# EAGLE board Emergency Light with Battery Charger (EAGLE 6.5.0)
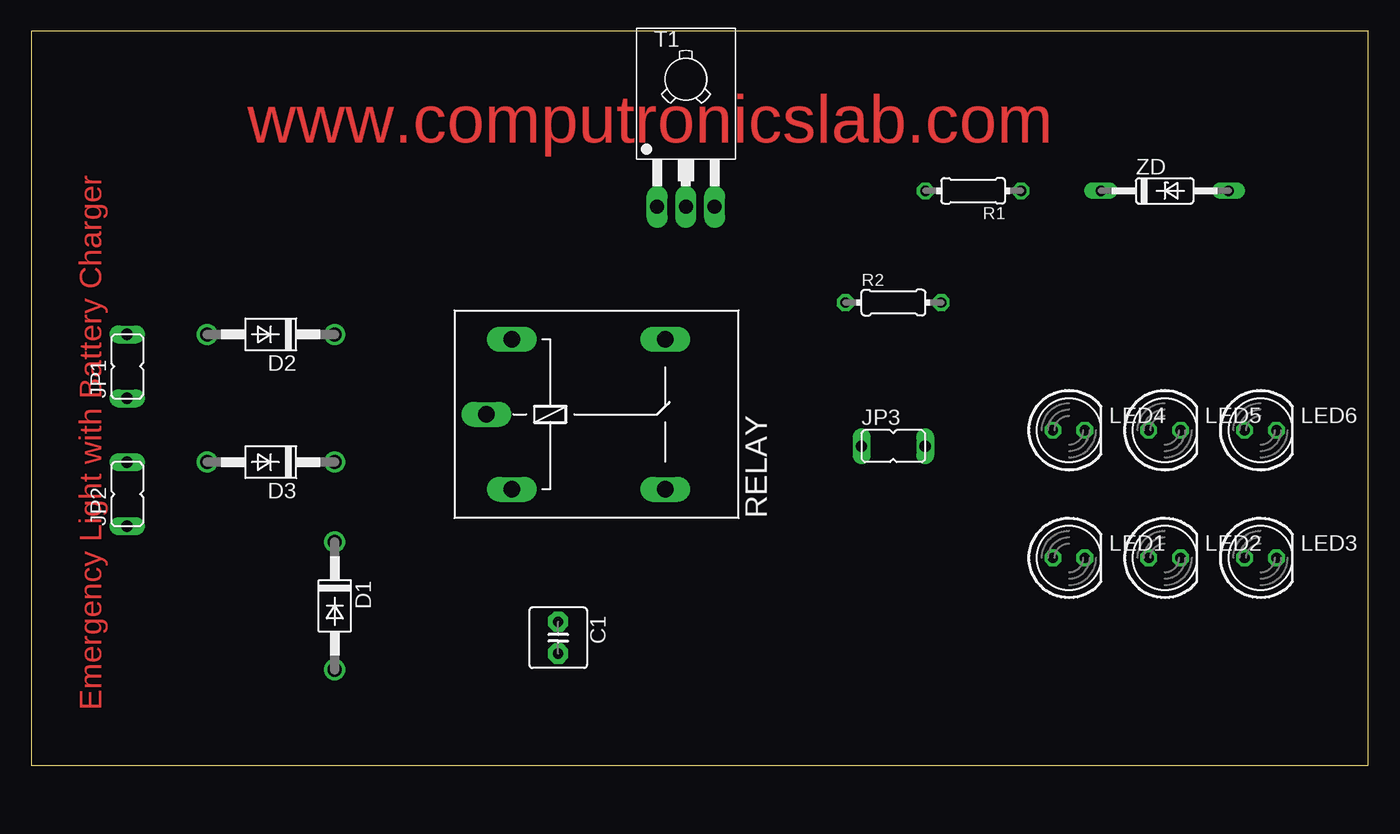
[diagram p0: board, top side]
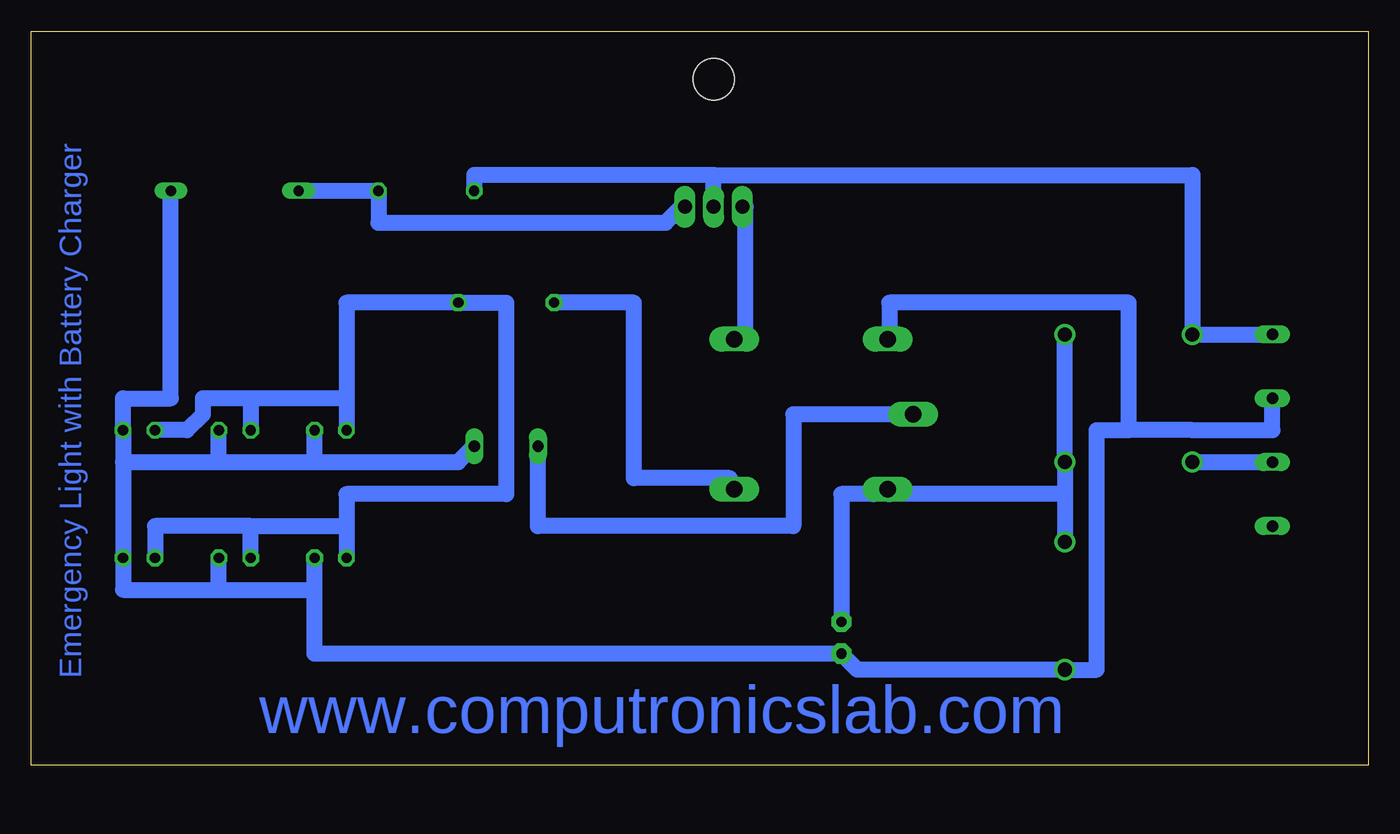
[diagram p1: board, bottom side, seen from below]

Size 106.35 x 58.41 mm. Coordinates in mm from the lower left corner, seen from the top.
Outline: 0,0 106.35,0 106.35,58.41 0,58.41 0,0
Copper layers (1*16): Top 0.035mm / dielectric 1.5mm / Bottom 0.035mm
Design rules "default *": minimum track width 50mil, minimum drill 24mil, track to track 8mil, track to pad 8mil, pad to pad 8mil, via to via 8mil, smd to smd 8mil, copper to edge 40mil, drill to drill 8mil, minimum pad ring 10mil, minimum via ring 8mil, stop-mask expansion 4mil, vias tented up to drill 0mil, thermal gap 10mil

## Footprints (pad centres in the part's own frame; a part is rotated, then mirrored left to right if it is on the bottom)
C2.5-5 = drill 0.813 pad 1.6 octagon: 1 -1.27,0; 2 1.27,0
DO41-10 = drill 1.118: A 5.08,0; C -5.08,0
JP1 = drill 0.914 long: 1 0,-2.54; 2 0,2.54
LED5MM = drill 0.813 octagon: A -1.27,0; K 1.27,0
0204/7 = drill 0.813 octagon: 1 -3.81,0; 2 3.81,0
G5LE = drill 1.321 long: 1 -7.493,-5.969; 2 -7.493,5.969; O 4.699,5.969; P -9.525,0; S 4.699,-5.969
TO126 = drill 1.118 long: 1 -2.286,-5.08; 2 0,-5.08; 3 2.286,-5.08 | hole 3.302: 0,5.08
DO35Z10 = drill 0.813 long: A 5.08,0; C -5.08,0

## Placement (x,y rotation side)
C1  100uf  [C2.5-5]  41.91,10.16 270 top
D1  1N4007  [DO41-10]  24.13,12.7 270 top
D2  1N4007  [DO41-10]  19.05,34.29 180 top
D3  1N4007  [DO41-10]  19.05,24.13 180 top
JP1  ac connector  [JP1]  7.62,31.75 0 top
JP2  ac connector  [JP1]  7.62,21.59 0 top
JP3  battery  [JP1]  68.58,25.4 270 top
LED1  5mm  [LED5MM]  82.55,16.51 0 top
LED2  5mm  [LED5MM]  90.17,16.51 0 top
LED3  5mm  [LED5MM]  97.79,16.51 0 top
LED4  5mm  [LED5MM]  82.55,26.67 0 top
LED5  5mm  [LED5MM]  90.17,26.67 0 top
LED6  5mm  [LED5MM]  97.79,26.67 0 top
R1  100E  [0204/7]  74.93,45.72 180 top
R2  47E  [0204/7]  68.58,36.83 0 top
RELAY  6V  [G5LE]  45.72,27.94 0 top
T1  BD139  [TO126]  52.07,49.53 0 top
ZD  6.8 V  [DO35Z10]  90.17,45.72 0 top

## Library data of the parts
C1 = capacitor-wima
D1-D3 ZD = diode
JP1-JP3 = jumper
LED1-LED6 = led
R1 R2 = rcl
RELAY = relay; OC_FARNELL: unknown; OC_NEWARK: unknown
T1 = transistor

## Nets
N$1: D2.A JP1.2 R1.2 T1.2
N$2: D3.A JP2.2
N$3: C1.1 D1.C D2.C D3.C RELAY.1
N$4: C1.2 D1.A JP1.1 JP3.2 LED1.K LED2.K LED3.K LED4.K LED5.K LED6.K RELAY.2 ZD.A
N$5: R1.1 T1.3 ZD.C
N$6: RELAY.O T1.1
N$7: JP3.1 RELAY.P
N$8: R2.1 RELAY.S
N$9: LED1.A LED2.A LED3.A LED4.A LED5.A LED6.A R2.2

## Tracks (layer width: path | path; a pad name or v marks a point on that pad's centre or on a via)
N$1
  Bottom 1.27: JP1.2 D2.A 13.97,46.99 52.07,46.99 | R1.2 71.12,46.99 53.34,46.99 52.07,46.99 | T1.2 52.07,46.99
N$2
  Bottom 1.27: D3.A JP2.2
N$3
  Bottom 1.27: C1.1 41.91,21.59 39.37,21.59 RELAY.1 38.1,21.59 24.13,21.59 | 24.13,21.59 D3.C D2.C | 24.13,21.59 D1.C
N$4
  Bottom 1.27: 91.44,13.97 83.82,13.97 LED1.K 83.82,8.89 C1.2 40.64,7.62 D1.A 21.59,7.62 21.59,26.67 19.05,26.67 | 99.06,24.13 LED6.K 99.06,29.21 95.25,29.21 ZD.A | 99.06,24.13 LED3.K 99.06,13.97 91.44,13.97 | 83.82,24.13 86.36,24.13 91.44,24.13 | 83.82,24.13 LED4.K | 99.06,24.13 91.44,24.13 | 91.44,24.13 LED5.K | JP3.2 72.39,24.13 83.82,24.13 | 91.44,13.97 LED2.K | JP1.1 7.62,26.67 13.97,26.67 19.05,26.67 | 19.05,26.67 19.05,36.83 38.1,36.83 38.1,34.29 RELAY.2
N$5
  Bottom 1.27: ZD.C R1.1 78.74,43.18 55.88,43.18 54.61,44.45 T1.3
N$6
  Bottom 1.27: T1.1 49.53,44.45 49.53,34.29 RELAY.O
N$7
  Bottom 1.27: JP3.1 66.04,19.05 45.72,19.05 45.72,27.94 RELAY.P
N$8
  Bottom 1.27: R2.1 58.42,36.83 58.42,22.86 50.8,22.86 RELAY.S
N$9
  Bottom 1.27: 88.9,19.05 81.28,19.05 | LED2.A 88.9,19.05 | LED3.A 96.52,19.05 88.9,19.05 | 81.28,29.21 81.28,36.83 R2.2 68.58,36.83 68.58,21.59 81.28,21.59 81.28,19.05 | 81.28,29.21 LED4.A | 88.9,29.21 LED5.A | 81.28,29.21 88.9,29.21 | LED6.A 93.98,26.67 92.71,27.94 92.71,29.21 88.9,29.21 | 81.28,19.05 LED1.A

## Text on the board
Top: www.computronicslab.com | Emergency Light with Battery Charger
Bottom: Emergency Light with Battery Charger | www.computronicslab.com